# Altium PCB BPC_Clock.PcbDoc
Units mm, origin at the board's own origin, x right, y up, seen from the top; angles counter-clockwise.
Board outline 100.25 x 59.58 mm, 2 copper layers (Top Layer, Bottom Layer); 67 components, 104 nets, 381 pads, 95 vias.
Unrouted connection lines stored in the file: 8.
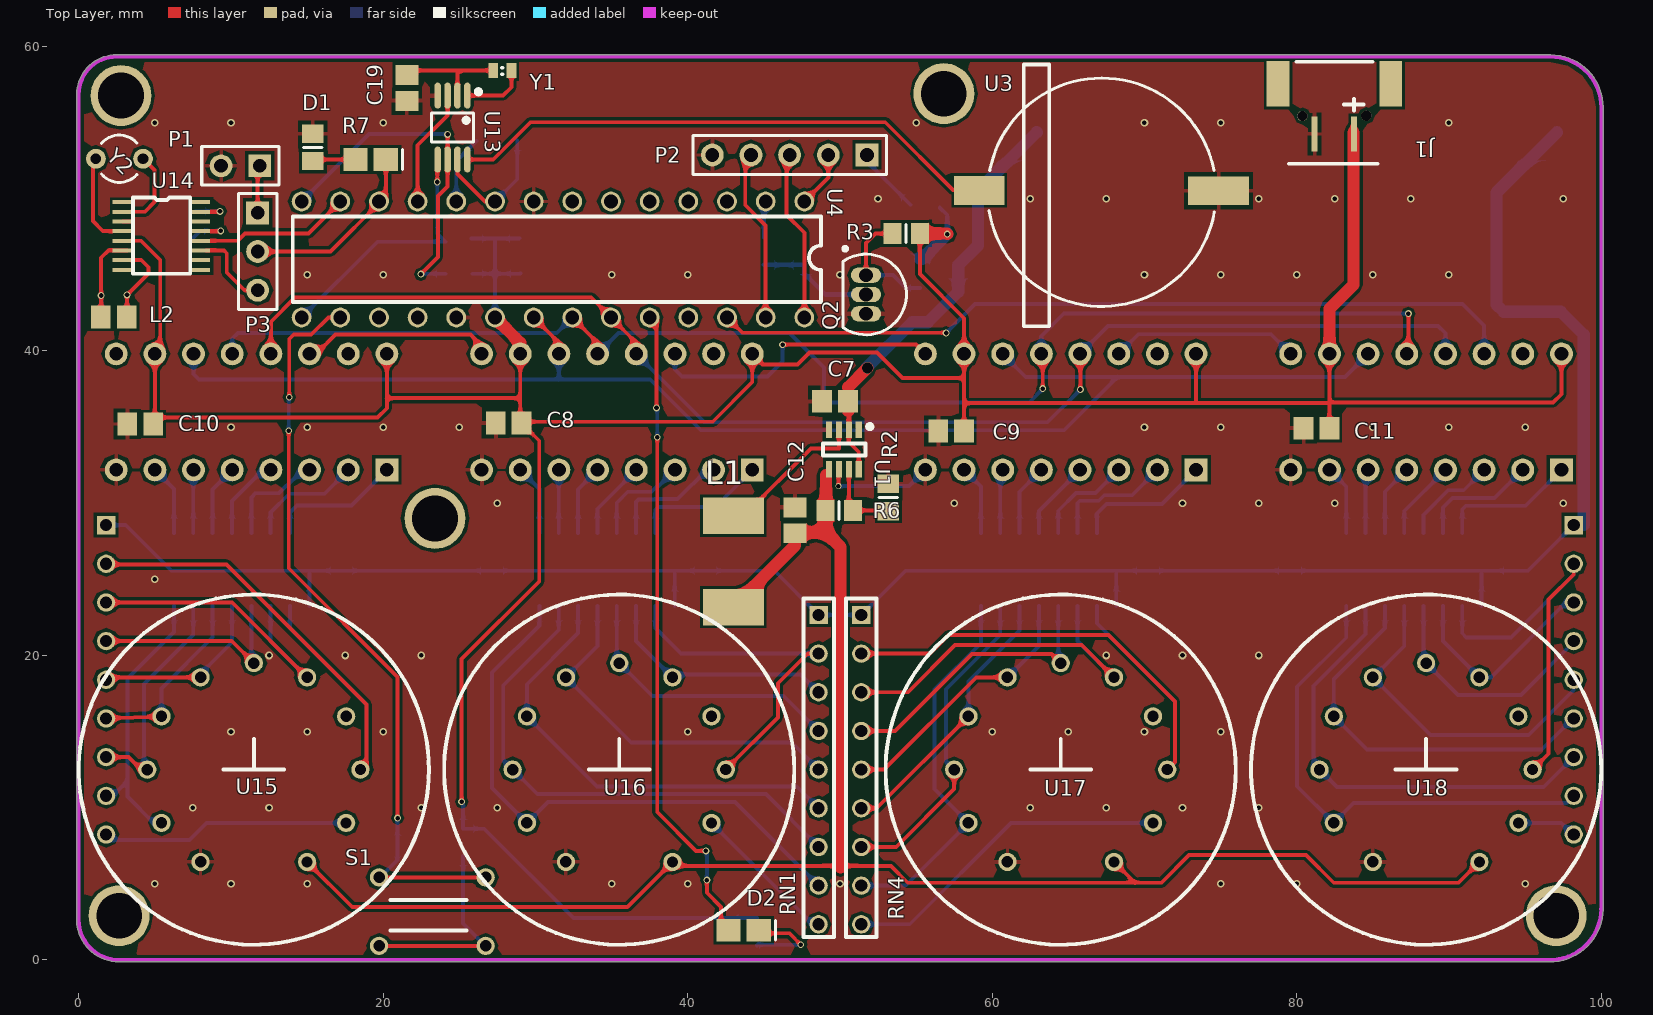
[diagram p0: Top Layer view]
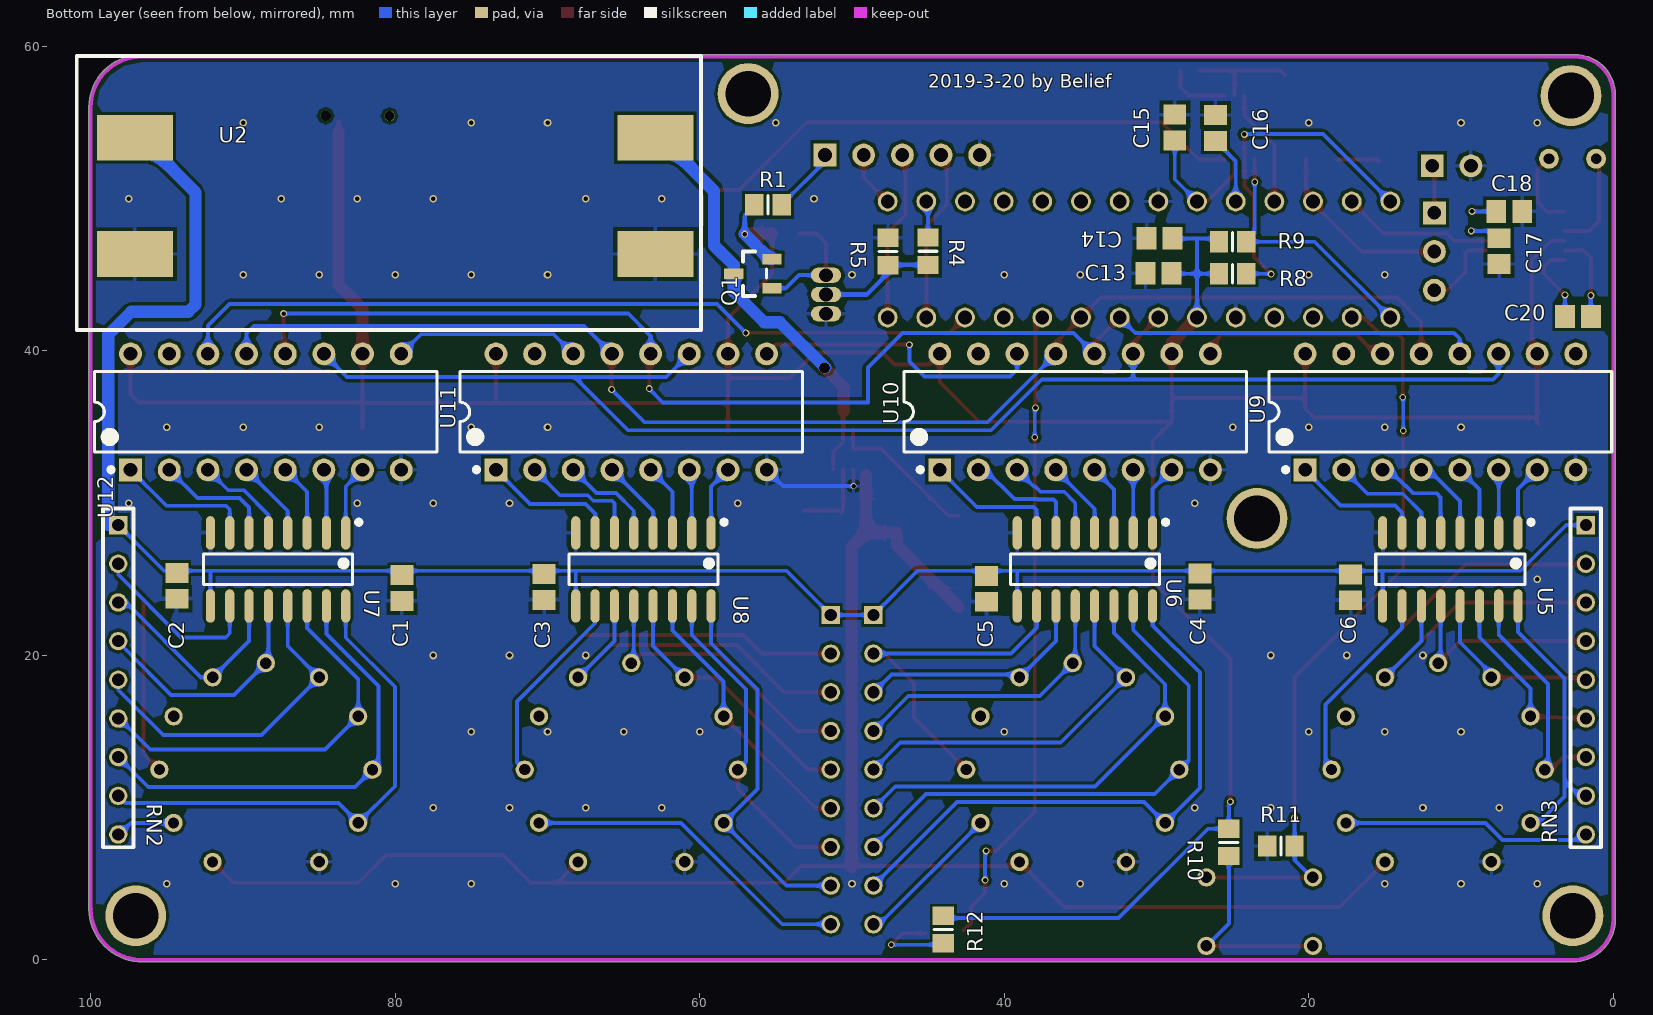
[diagram p1: Bottom Layer view, seen from below]

## Layer stack, top to bottom
Top Solder: solder mask 0.0102, Solder Resist, Dk 3.5
Top Layer: signal copper 0.0356
Dielectric 1: dielectric 0.32, FR-4, Dk 4.8
Bottom Layer: signal copper 0.0356
Bottom Solder: solder mask 0.0102, Solder Resist, Dk 3.5

## Board outline
2.635,-0.127 cw(c2.635,2.635) -0.127,2.635 -0.127,56.855 cw(c2.47,56.855) 2.47,59.452 96.672,59.452 cw(c96.672,59.325) 96.672,59.452 cw(c96.672,55.997) 100.127,55.997 100.127,3.375 cw(c100,3.375) 100.126,3.356 cw(c100,3.339) 100.127,3.339 cw(c100,3.339) 100.127,3.338 cw(c96.625,3.375) 96.625,-0.127

## Design rules (kind name [scope] priority, off if disabled: settings)
Clearance [All] p1: gap=0.2
HoleSize [All] p1: absolutevalues=TRUE maxlimit=3.5 minlimit=0.025 maxpercent=80.000 minpercent=20.000
HoleToHoleClearance [All] p1: gap=0.1 allowstackedmicrovias=TRUE
MinimumSolderMaskSliver [All] p1: minsoldermaskwidth=0.01
PolygonConnect [All] p1: connectstyle=Relief reliefconductorwidth=0.254 reliefentries=4 polygonreliefangle="90 Angle" airgapwidth=0.254
RoomDefinition BPC_Clock [InComponentClass('BPC_Clock')] p1: confinementstyle=ConfineIn formatcopy=TRUE lockcomponents=FALSE outline -6.585,-7.855 167.913,-7.855 167.913,112.414 -6.585,112.414
RoutingVias [All] p1: holewidth=0.3 width=0.5 viastyle="Through Hole" minholewidth=0.3 minwidth=0.4 maxholewidth=3.2 maxwidth=6
SilkToSilkClearance [All] p1: silktosilkclearance=0.01
SilkToSolderMaskClearance [IsPad] p1: minsilkscreentomaskgap=0.01 clearancetoexposedcopper=TRUE
SolderMaskExpansion [All] p1: expansion=0.102
Width [All] p1: maxlimit=0.8 minlimit=0.254 preferedwidth=0.254
25 further rules are at their usual default settings.

## Components (designator, comment, footprint, x,y, rotation, side; value= is the part's Value field where it differs from the comment)
C1 "Cap" CAPC2012N 79.57,24.43 r270 bottom
C2 "Cap" CAPC2012N 94.35,24.575 r270 bottom
C3 "Cap" CAPC2012N 70.225,24.5 r270 bottom
C4 "Cap" CAPC2012N 27.15,24.525 r270 bottom
C5 "Cap" CAPC2012N 41.175,24.375 r270 bottom
C6 "Cap" CAPC2012N 17.25,24.475 r270 bottom
C7 "Cap" CAPC2012N 49.675,36.7 r180 top
C8 "Cap" CAPC2012N 28.24,35.26 r180 top
C9 "Cap" CAPC2012N 57.3,34.75 r180 top
C10 "Cap" CAPC2012N 4.04,35.2 r180 top
C11 "Cap" CAPC2012N 81.3,34.92 r180 top
C12 "Cap" CAPC2012N 47.05,28.875 r90 top
C13 "Cap" CAPC2012N 29.875,45.1 r0 bottom
C14 "Cap" CAPC2012N 29.8,47.4 r0 bottom
C15 "Cap" CAPC2012N 28.8,54.675 r270 bottom
C16 "Cap" CAPC2012N 26.125,54.65 r270 bottom
C17 "Cap" CAPC2012N 7.5,46.56 r270 bottom
C18 "Cap" CAPC2012N 6.83,49.17 r180 bottom
C19 "Cap" CAPC2012N 21.55,57.275 r270 top
C20 "Cap" CAPC2012N 2.32,42.26 r180 bottom
D1 "LED Bpc" CAPC2512N 19.175,52.575 r180 top
D2 "LED State" CAPC2512N 43.675,1.95 r180 top
J1 "microusb" microusb 82.475,54.25 r180 top
L1 "Chip inductors" PCBComponent_1 43,26.175 r90 top
L2 "Antenna" CAPC2012N 2.3,42.235 r180 top
P1 "Test code" HDR1X2 11.89,52.16 r180 top
P2 "Header 5" HDR1X5 51.775,52.875 r180 top
P3 "Jumper" HDR1X3 11.75,49.07 r270 top
Q1 "3415" LC-SOT-23(SOT-23-3) 56.52,45.08 r180 bottom
Q2 "NPN" BCY-W3 51.71,43.71 r180 top
R1 "0" "RES 0805N (2012)" 55.525,49.6 r0 bottom
R2 "80k" "RES 0805N (2012)" 53.175,30.375 r270 top
R3 "100k" "RES 0805N (2012)" 54.35,47.71 r180 top
R4 "10k" "RES 0805N (2012)" 45.01,46.55 r270 bottom
R5 "10k" "RES 0805N (2012)" 47.64,46.53 r270 bottom
R6 "120k" "RES 0805N (2012)" 49.95,29.525 r180 top
R7 "2k" "RES 0805N (2012)" 15.375,53.375 r270 top
R8 "10K" "RES 0805N (2012)" 25,45.075 r0 bottom
R9 "10K" "RES 0805N (2012)" 25,47.175 r0 bottom
R10 "1k" "RES 0805N (2012)" 25.25,7.72 r90 bottom
R11 "2k" "RES 0805N (2012)" 21.83,7.48 r180 bottom
R12 "1k" "RES 0805N (2012)" 44,2 r90 bottom
RN1 "RN-9P" RN-9P 48.6,12.5 r0 top locked
RN2 "RN-9P" RN-9P 98.2,18.4 r180 bottom
RN3 "RN-9P" RN-9P 1.8,18.4 r180 bottom locked
RN4 "RN-9P" RN-9P 51.4,12.5 r0 top locked
S1 "Syn_button" sw 26.475,0.925 r180 top
U1 "MP2161" LC-TSOT-23-8 50.26,33.53 r180 top
U2 "MT3608" MT3608 97.92,54.37 r180 bottom locked
U3 "button_bat" button_bat 67.2,50.425 r270 top locked
U4 "PIC16F1786" PIC-28 47.66,49.82 r270 top locked
U5 "ULN2003" LC-SOP-16_150mil 10.7,25.65 r0 bottom locked
U6 "ULN2003" LC-SOP-16_150mil 34.7,25.65 r0 bottom locked
U7 "ULN2003" LC-SOP-16_150mil 87.7,25.65 r0 bottom locked
U8 "ULN2003" LC-SOP-16_150mil 63.7,25.65 r0 bottom locked
U9 "74HC595" LC-DIP-16 11.35,36 r90 bottom locked
U10 "74HC595" LC-DIP-16 35.35,36 r90 bottom locked
U11 "74HC595" LC-DIP-16 64.5,36 r90 bottom locked
U12 "74HC595" LC-DIP-16 88.5,36 r90 bottom locked
U13 "HYM8563S" LC-MSOP-8 24.55,54.675 r180 top locked
U14 "CME6005" CME6005 5.425,49.775 r0 top
U15 "VFD" IV-11 11.5,12.5 r0 top locked
U16 "VFD" IV-11 35.5,12.5 r0 top locked
U17 "VFD" IV-11 64.5,12.5 r0 top locked
U18 "VFD" IV-11 88.5,12.5 r0 top locked
Y1 "XTAL" Crystal 28.425,58.425 r180 top
Y2 "XTAL" BCY-W2/D3.1 2.675,52.625 r270 top

## Footprints (in the part's own frame and the unit in brackets; to place one, negate y for a bottom-side part, rotate by r counter-clockwise, add the part's x,y. Pads: shape width x height; smd on the part's side, far side on the other; paste and mask are expansions set on the pad)
BCY-W2/D3.1 [mm] "Crystal, Thru-Hole; 2 Leads; Body 3.1 x 8.2 mm (Dia.xH)"
  round 1.3 hole 0.7: 1(0,1.55) 2(0,-1.55)
  silkscreen extent -1.55,-1.19 1.55,1.17
BCY-W3 [mm] "TO, Flat Index; 3 In-Line, Axial Leads; Body Dia. 4.8mm; Leads 0.55 x 0.51 mm (max)"
  oval 2x1 hole 0.9: 1(0,-1.27) 2(0,0) 3(0,1.27)
  silkscreen extent -2.65,-3.13 1.52,2.65, body extent -2.65,-2.66 1.52,2.66, height 5.33
button_bat [mm]
  rect 1.9x3.3 smd: 1(-0.125,-8.05)
  rect 1.9x4 smd: 2(-0.1,7.675)
  silkscreen extent -8.4,-7.4 8.8,7.38
CAPC2012N [mm] "Chip Capacitor, Body 2.0x1.3mm, IPC Medium Density"
  rect 1.3x1.5 smd: 1(-0.85,0) 2(0.85,0)
  body extent -1.1,-0.72 1.1,0.72, height 1.1
CAPC2512N [mm] "Chip Capacitor, Body 2.54x1.27mm, IPC Medium Density"
  rect 1.6x1.5 smd: 1(-1,0) 2(1,0)
  silkscreen extent -2.1,-0.65 -2.1,0.65, body extent -1.45,-0.82 1.45,0.82, height 1.66
CME6005 [mm]
  rect 1.2x0.27 smd: 1(-2.6,0) 2(-2.6,-0.635) 3(-2.6,-1.27) 4(-2.6,-1.905) 5(-2.6,-2.54) 6(-2.6,-3.175) 7(-2.6,-3.81) 8(-2.6,-4.445) 9(2.6,-4.445) 10(2.6,-3.81) 11(2.6,-3.175) 12(2.6,-2.54) 13(2.6,-1.905) 14(2.6,-1.27) 15(2.6,-0.635) 16(2.6,0)
  silkscreen extent -1.85,-4.7 1.9,0.3
Crystal [mm]
  rect 0.65x1 smd: 1(0,0) 2(1.2,0)
  silkscreen extent 0.58,-0.18 0.63,0.25
HDR1X2 [mm] "Connector; Header; 2 Position"
  rect 1.5x1.5 hole 0.9: 1(0,0)
  round 1.5 hole 0.9: 2(2.54,0)
  silkscreen extent -1.27,-1.27 3.81,1.27
HDR1X3 [mm] "Connector; Header; 3 Position"
  rect 1.5x1.5 hole 0.9: 1(0,0)
  round 1.5 hole 0.9: 2(2.54,0) 3(5.08,0)
  silkscreen extent -1.27,-1.27 6.35,1.27
HDR1X5 [mm] "Connector; Header; 5 Position"
  rect 1.5x1.5 hole 0.9: 1(0,0)
  round 1.5 hole 0.9: 2(2.54,0) 3(5.08,0) 4(7.62,0) 5(10.16,0)
  silkscreen extent -1.27,-1.27 11.43,1.27
IV-11 [mm]
  round 1.2 hole 0.73: 1(3.5,-6.062) 2(6.062,-3.5) 3(7,0)
  round 1.2 hole 0.75: 4(6.062,3.5) 5(3.5,6.062) 6(0,7) 7(-3.5,6.062) 8(-6.062,3.5) 9(-7,0) 10(-6.062,-3.5) 11(-3.5,-6.062)
  silkscreen extent -11.5,-11.5 11.5,11.5, body extent -10,-10 10,10, height 50
LC-DIP-16 [mm]
  rect 1.5x1.5 hole 0.9: 1(-3.81,8.89)
  round 1.5 hole 0.9: 2(-3.81,6.35) 3(-3.81,3.81) 4(-3.81,1.27) 5(-3.81,-1.27) 6(-3.81,-3.81) 7(-3.81,-6.35) 8(-3.81,-8.89) 9(3.81,-8.89) 10(3.81,-6.35) 11(3.81,-3.81) 12(3.81,-1.27) 13(3.81,1.27) 14(3.81,3.81) 15(3.81,6.35) 16(3.81,8.89)
  silkscreen extent -3.95,-11.25 2.65,11.25
LC-MSOP-8 [mm]
  oval 0.43x1.7 smd mask+0.051: 1(-0.975,-2.1) 2(-0.325,-2.1) 3(0.325,-2.1) 4(0.975,-2.1) 5(0.975,2.1) 6(0.325,2.1) 7(-0.325,2.1) 8(-0.975,2.1)
  silkscreen extent -1.85,-2.5 1.38,0.95
LC-SOP-16_150mil [mm]
  oval 0.6x2.2 smd: 1(-4.445,-2.4) 2(-3.175,-2.4) 3(-1.905,-2.4) 4(-0.635,-2.4) 5(0.635,-2.4) 6(1.905,-2.4) 7(3.175,-2.4) 8(4.445,-2.4) 9(4.445,2.4) 10(3.175,2.4) 11(1.905,2.4) 12(0.635,2.4) 13(-0.635,2.4) 14(-1.905,2.4) 15(-3.175,2.4) 16(-4.445,2.4)
  silkscreen extent -5.45,-3.25 4.9,1
LC-SOT-23(SOT-23-3) [mm]
  rect 1.25x0.7 smd: 1(1.25,-0.95) 2(-1.25,0) 3(1.25,0.95)
  silkscreen extent -0.65,-1.46 0.9,1.46, body extent -1.5,-1.5 1.5,1.5, height 1.3
LC-TSOT-23-8 [mm]
  rect 0.4x1.1 smd mask+0.051: 1(-0.975,-1.3) 2(-0.325,-1.3) 3(0.325,-1.3) 4(0.975,-1.3) 5(0.975,1.3) 6(0.325,1.3) 7(-0.325,1.3) 8(-0.975,1.3)
  silkscreen extent -1.85,-1.65 1.38,0.4
microusb [mm]
  rect 0.4x2.3 smd: 1(-1.3,0) 2(1.3,0)
  rect 1.5x3 smd: G(-3.7,-3.3) G(3.7,-3.3)
  round 0.67 hole 0.67: N(-2.1,-1.2) N(2.1,-1.175)
  silkscreen extent -2.83,-4.75 3,1.95
MT3608 [mm]
  rect 5x3 smd: 1(0.82,-0.37) 2(0.82,-8) 3(35,-0.37) 4(35,-8)
  silkscreen extent -3,-13 38,5
PCBComponent_1 [mm]
  rect 2.4x4 smd: 1(-3,0) 2(3,0)
PIC-28 [mm]
  round 1.3 hole 0.9: 1(0,0) 2(0,-2.54) 3(0,-5.08) 4(0,-7.62) 5(0,-10.16) 6(0,-12.7) 7(0,-15.24) 8(0,-17.78) 9(0,-20.32) 10(0,-22.86) 11(0,-25.4) 12(0,-27.94) 13(0,-30.48) 14(0,-33.02) 15(7.62,-33.02) 16(7.62,-30.48) 17(7.62,-27.94) 18(7.62,-25.4) 19(7.62,-22.86) 20(7.62,-20.32) 21(7.62,-17.78) 22(7.62,-15.24) 23(7.62,-12.7) 24(7.62,-10.16) 25(7.62,-7.62) 26(7.62,-5.08) 27(7.62,-2.54) 28(7.62,0)
  silkscreen extent 1,-33.6 6.6,1.1
"RES 0805N (2012)" [mm] "Chip Resistor, Body 2.0x1.2mm, IPC Medium Density"
  rect 1.2x1.4 smd: 1(-0.9,0) 2(0.9,0)
  silkscreen extent 0,-0.6 0,0.6, body extent -1,-0.63 1,0.63, height 0.55
RN-9P [mm]
  rect 1.2x1.2 hole 0.8: 1(0,10.16)
  round 1.2 hole 0.8: 2(0,7.62) 3(0,5.08) 4(0,2.54) 5(0,0) 6(0,-2.54) 7(0,-5.08) 8(0,-7.62) 9(0,-10.16)
  silkscreen extent -1,-11 1,11.25
sw [mm]
  round 1.2 hole 0.75: 1(-0.25,0) 1(6.75,0) 2(-0.25,-4.5) 2(6.75,-4.5)
  Top Overlay keep-out lines w0.254: 6,-1 1,-1 ; 6,-3 1,-3
  silkscreen extent 1,-3 6,-1

## Part data
C1 C2 C3 C4 C5 C6 C7 C8 C9 C10 C11 C12 C13 C14 C15 C16 C17 C18 C19 C20: "Capacitor"
D1 D2: library part LED2, "Typical RED, GREEN, YELLOW, AMBER GaAs LED"
L2: library part Inductor, "Inductor"
P1: library part "Header 2", "Header, 2-Pin"
P2: "Header, 5-Pin"
P3: library part "Header 3", "Header, 3-Pin"
Q1: library part PMOS-2, "P-Channel Power MOSFET"
Q2: "NPN Bipolar Transistor"
R1 R2 R3 R4 R5 R6 R7 R8 R9 R10 R11 R12: library part Res1, "Resistor"
S1: library part SW-PB, "Switch"
Y1 Y2: "Crystal Oscillator"

## Free pads (board coordinates)
  round 4 hole 3: 0(2.65,2.9) 0(2.775,56.775) 1(97.05,2.9) 3(23.4,29) 5(56.825,56.9)

## Via types
v1: diameter 0.5, hole 0.3, Top Layer to Bottom Layer, 71 vias
v2: diameter 0.45, hole 0.3, Top Layer to Bottom Layer, 22 vias
v3: diameter 0.4, hole 0.3, Top Layer to Bottom Layer, 1 vias
v4: diameter 0.711, hole 0.711, Top Layer to Bottom Layer, 1 vias

## Nets (pads, with @x,y where several pads share a name; then routed paths per layer and width w, separated by ;. In a path a pad name is that pad's centre, name@x,y a point inside that pad or via, vN(x,y) a via of type N, cw(c..) or ccw(c..) an arc to the next point about the centre after c; other vN are vias at no path point)
BPC_CODE: P3.3 U14.11 | length 5.2
  Top Layer w0.254: U14.11@8.385,46.605 9.535,46.605 9.722,46.418 9.722,45.158 10.89,43.99 P3.3
BPC_DATA: D1.1 P3.2 U4.12 | length 12.3
  Top Layer w0.254: P3.2 16.53,46.53 U4.12@19.77,49.77 ; U4.12 20.175,50.275 D1.1
BPC_ON: U4.13 U14.12 | length 9.9
  Top Layer w0.254: U14.12@8.385,47.24 10.45,47.24 10.93,47.72 15.08,47.72 U4.13
BPC_TEST: P1.1 P3.1 | length 3.1
  Top Layer w0.254: P3.1 11.75,52.02 P1.1
CLKOUT: C15.2 U4.9 U13.7 | length 8.8
  Top Layer w0.254: U13.7 24.875,51.625 26.68,49.82 U4.9
  Bottom Layer w0.254: U4.9 28.8,51.28 C15.2
GND: C1.2 C2.2 C3.2 C4.2 C5.2 C6.2 C7.2 C8.2 C9.2 C10.2 C11.2 C12.2 C13.2 C14.2 C15.1 C16.1 C17.2 C18.2 C19.2 J1.2 P1.2 P2.5 Q2.3 R2.1 R5.1 R7.1 R11.1 U1.4 U1.6 U2.2 U2.4 U3.2 U4.8 U4.19 U5.8 U6.8 U7.8 U8.8 U9.8 U10.8 U11.8 U12.8 U13.4 U14.3 U15.11 U16.11 U17.11 U18.11 | length 7.3
  Top Layer w0.254: v3(49.9,31.125) 49.9,32.195 U1.6
  Bottom Layer w0.254: v3(49.9,31.125) 54.545,31.125 U11.8
  other v1: 5,5 10,5 15,5 35,5 40,5 50,5 75,5 80,5 95,5 7.5,10 12.5,10 22.5,10 27.5,10 62.5,10 67.5,10 72.5,10 77.5,10 10,15 15,15 20,15 40,15 60,15 65,15 70,15 75,15 12.5,20 17.5,20 22.5,20 67.5,20 72.5,20 77.5,20 5,25 27.5,30 57.5,30 72.5,30 77.5,30 82.5,30 97.5,30 10,35 15,35 20,35 25,35 70,35 75,35 85,35 90,35 95,35 15,45 20,45 35,45 40,45 50,45 70,45 75,45 80,45 85,45 90,45 52.5,50 62.5,50 67.5,50 77.5,50 82.5,50 87.5,50 97.5,50 5,55 10,55 20,55 55,55 70,55 75,55 90,55
LIGHT_ON: R4.1 U4.2 | length 2.4
  Bottom Layer w0.254: R4.1 45.01,49.71 U4.2
NetC16_2: C16.2 U4.10 | length 4.5
  Bottom Layer w0.254: U4.10 24.8,52.475 C16.2
NetC17_1: C17.1 U14.13 | length 3
  Top Layer w0.254: U14.13@8.385,47.875 9.315,47.875 v2(9.33,47.89)
  Bottom Layer w0.254: C17.1 7.98,47.89 v2(9.33,47.89)
NetC18_1: C18.1 U14.15 | length 2.5
  Top Layer w0.254: U14.15@8.385,49.145 9.255,49.145 v2(9.28,49.17)
  Bottom Layer w0.254: C18.1 v2(9.28,49.17)
NetC19_1: C19.1 U13.2 Y1.2 | length 7.5
  Top Layer w0.254: C19.1 21.85,58.425 25.075,58.425 ; U13.2 24.875,58.225 25.075,58.425 ; Y1.2 25.075,58.425
NetC20_1: C20.1 L2.1 U14.7 | length 6.8
  Top Layer w0.254: L2.1@3.17,42.26 v2(3.17,43.685) 4.575,45.09 4.575,45.5 4.105,45.97 U14.7@3.185,45.97
  Bottom Layer w0.254: C20.1@3.17,42.245 C20.1 v2(3.17,43.685)
NetC20_2: C20.2 L2.2 U14.6 | length 7.2
  Top Layer w0.254: L2.2@1.47,42.26 v2(1.47,43.645) 1.47,46.12 1.955,46.605 U14.6@3.185,46.605
  Bottom Layer w0.254: C20.2@1.47,42.245 C20.2 v2(1.47,43.645)
NetD1_2: D1.2 R7.2 | length 2.8
  Top Layer w0.254: R7.2 15.475,52.575 D1.2
NetD2_1: D2.1 R12.1 | length 5.5
  Top Layer w0.254: D2.1@45.175,1.75 46.675,1.75 v2(47.425,1)
  Bottom Layer w0.254: R12.1@44.55,0.95 44.64,1.04 44.68,1 v2(47.425,1)
NetL1_2: L1.2 U1.3 | length 10
  Top Layer w0.254: L1.2 43.675,29.175 48.095,33.595 49.935,33.595 U1.3
NetP2_1: P2.1 R1.1 | length 4.5
  Bottom Layer w0.254: P2.1 51.775,52.45 R1.1
NetQ1_1: Q1.1 Q2.1 R3.2 | length 8
  Top Layer w0.254: Q2.1 51.71,47.09 52.33,47.71 R3.2
  Bottom Layer w0.254: Q2.1 53.49,44.98 54.34,44.13 Q1.1
NetQ2_2: Q2.2 R4.2 R5.2 | length 7.8
  Bottom Layer w0.3: R4.2 47.62,45.65 R5.2 47.64,45.11 49.04,43.71 Q2.2
NetR2_2: R2.2 R6.1 U1.7 | length 5.2
  Top Layer w0.254: U1.7 50.585,29.515 R6.1@50.712,29.388 ; R6.1 53.125,29.525 R2.2
NetR10_1: R10.1 S1.2 | length 13.5
  Top Layer w0.254: 19.725,0.925 26.725,0.925
  Bottom Layer w0.254: R10.1 25.25,2.4 26.725,0.925
NetU5_1: U5.1 U9.7 | length 4.7
  Bottom Layer w0.254: U9.7 6.255,30.935 U5.1
NetU5_2: U5.2 U9.6 | length 4.1
  Bottom Layer w0.254: U5.2 7.525,32.175 U9.6
NetU5_3: U5.3 U9.5 | length 4.7
  Bottom Layer w0.254: U5.3 8.795,30.905 U9.5
NetU5_4: U5.4 U9.4 | length 5.5
  Bottom Layer w0.254: U5.4 10.065,30.155 12.1,32.19 U9.4
NetU5_5: U5.5 U9.3 | length 7.1
  Bottom Layer w0.254: U5.5 11.335,30.385 11.608,30.658 13.15,30.658 13.62,31.128 13.655,31.128 14.498,31.971 14.719,31.749 U9.3
NetU5_6: U5.6 U9.2 | length 7.6
  Bottom Layer w0.254: U5.6 12.605,29.395 13.83,30.62 16.13,30.62 U9.2
NetU5_7: U5.7 U9.1 | length 8.9
  Bottom Layer w0.254: U5.7 13.875,29.4 14.335,29.86 17.91,29.86 U9.1
NetU6_1: U6.1 U10.7 | length 4.7
  Bottom Layer w0.254: U10.7 30.255,30.935 U6.1
NetU6_2: U6.2 U10.6 | length 4.1
  Bottom Layer w0.254: U6.2 31.525,32.175 U10.6
NetU6_3: U6.3 U10.5 | length 4.7
  Bottom Layer w0.254: U6.3 32.795,30.905 U10.5
NetU6_4: U6.4 U10.4 | length 5.2
  Bottom Layer w0.254: U6.4 34.065,29.635 U10.4
NetU6_5: U6.5 U10.3 | length 6.7
  Bottom Layer w0.254: U6.5 35.335,30.025 36.06,30.75 37.623,30.75 37.969,31.096 38.066,31.096 U10.3
NetU6_6: U6.6 U10.2 | length 8
  Bottom Layer w0.254: U6.6 36.605,30.085 36.762,30.242 37.834,30.242 37.862,30.27 39.34,30.27 41.26,32.19 U10.2
NetU6_7: U6.7 U10.1 | length 9
  Bottom Layer w0.254: U6.7 37.875,29.565 38.072,29.762 41.812,29.762 U10.1
NetU7_1: U7.1 U12.7 | length 4.6
  Bottom Layer w0.254: U12.7 83.255,31.085 U7.1
NetU7_2: U7.2 U12.6 | length 4.2
  Bottom Layer w0.254: U7.2 84.525,32.025 U12.6
NetU7_3: U7.3 U12.5 | length 4.7
  Bottom Layer w0.254: U7.3 85.795,30.755 U12.5
NetU7_4: U7.4 U12.4 | length 5.3
  Bottom Layer w0.254: U7.4 87.065,29.485 U12.4
NetU7_5: U7.5 U12.3 | length 6.4
  Bottom Layer w0.254: U7.5 88.335,29.235 89.95,30.85 90.97,30.85 U12.3
NetU7_6: U7.6 U12.2 | length 7.9
  Bottom Layer w0.254: U7.6 89.605,29.725 90.222,30.342 93.002,30.342 U12.2
NetU7_7: U7.7 U12.1 | length 9.1
  Bottom Layer w0.254: U7.7 90.875,29.595 91.114,29.834 95.034,29.834 U12.1
NetU8_1: U8.1 U11.7 | length 4.6
  Bottom Layer w0.254: U11.7 59.255,31.085 U8.1
NetU8_2: U8.2 U11.6 | length 4.2
  Bottom Layer w0.254: U8.2 60.525,32.025 U11.6
NetU8_3: U8.3 U11.5 | length 4.7
  Bottom Layer w0.254: U8.3 61.795,30.755 U11.5
NetU8_4: U8.4 U11.4 | length 5.3
  Bottom Layer w0.254: U8.4 63.065,29.485 U11.4
NetU8_5: U8.5 U11.3 | length 6.5
  Bottom Layer w0.254: U8.5 64.335,29.505 65.5,30.67 66.79,30.67 U11.3
NetU8_6: U8.6 U11.2 | length 8.1
  Bottom Layer w0.254: U8.6 65.605,29.995 65.772,30.162 67,30.162 67.358,30.52 69.18,30.52 U11.2
NetU8_7: U8.7 U11.1 | length 9
  Bottom Layer w0.254: U8.7 66.875,29.318 67.507,29.95 71.15,29.95 U11.1
NetU9_14: U9.14 U10.9 | length 13.2
  Top Layer w0.254: U9.14 15.16,40.25 15.46,39.95 15.75,39.95 16.87,41.07 25.72,41.07 26.46,40.33 U10.9
NetU10_14: U10.14 U11.9 | length 19.6
  Top Layer w0.254: U10.14 U10.14@39.39,39.81 ; v2@46.25,40.42 55,40.42 U11.9
  Bottom Layer w0.254: U10.14 39.16,38.79 39.62,38.33 45.24,38.33 46.23,39.32 v2(46.23,40.41)
NetU11_14: U11.14 U12.9 | length 12.4
  Bottom Layer w0.254: U11.14 69.6,41.1 78.32,41.1 U12.9
NetU13_1: U13.1 Y1.1 | length 4.2
  Top Layer w0.254: U13.1 27.875,56.775 28.425,57.325 Y1.1
NetU14_2: U14.2 Y2.2 | length 5.2
  Top Layer w0.254: U14.2@3.185,49.145 4.345,49.145 4.975,49.775 4.975,51.875 4.225,52.625
NetU14_4: U14.4 Y2.1 | length 6.6
  Top Layer w0.254: 0.925,52.625 0.925,48.525 1.575,47.875 U14.4@3.185,47.875
PIC_CLK: P2.4 U4.27 | length 11.4
  Top Layer w0.254: P2.4 43.775,52.495 43.775,49.575 45.12,48.23 U4.27
PIC_DA: P2.3 U4.28 | length 11.2
  Top Layer w0.254: P2.3 46.5,52.68 46.5,48.925 47.66,47.765 U4.28
PIC_DATA: U4.26 U12.14 | length 53.4
  Top Layer w0.254: U4.26 43.58,41.2 v2@57,41.2
  Bottom Layer w0.254: v2(56.97,41.18) 58.871,43.081 90.889,43.081 92.31,41.66 U12.14
PIC_INT: U4.11 U13.3 | length 7.8
  Top Layer w0.254: U4.11 22.26,53.51 24.225,55.475 U13.3
PIC_OE: U4.23 U9.13 U10.13 U11.13 U12.13 | length 89.3
  Top Layer w0.254: U9.13 12.62,41.92 14.2,43.5 33.66,43.5 U4.23 36.62,40.54 U10.13 ; U11.13 65.79,39.79 v2(65.79,37.47)
  Bottom Layer w0.254: U10.13 41.11,35.32 63.64,35.32 v2(65.79,37.47) ; U11.13 67.6,41.64 89.29,41.64 89.77,41.16 U12.13
PIC_SCL: R8.1 U4.14 U13.6 | length 23
  Top Layer w0.254: v2(22.475,45.05) 23.6,46.175 23.6,50.175 24.225,50.8 U13.6 v2(24.225,54.225)
  Bottom Layer w0.254: U4.14 19.07,54.25 24.075,54.25 v2@24.225,54.1 ; v2(22.475,45.05) 22.5,45.075 R8.1
PIC_SDA: R9.1 U4.15 U13.5 | length 17.1
  Top Layer w0.254: v2(23.55,51.1) 23.55,52.55 U13.5
  Bottom Layer w0.254: U4.15 19.615,47.175 R9.1@24.05,47.175 ; v2(23.55,51.1) 23.55,47.725 R9.1
PIC_SHCP: U4.21 U9.11 U10.11 U11.11 U12.11 | length 95
  Top Layer w0.254: U4.21 31.54,40.54 U10.11
  Bottom Layer w0.254: U9.11 7.54,38.49 7.91,38.12 31.54,38.12 ; U10.11 31.54,38.12 ; U11.11 62.2,38.3 68.22,38.3 ; U12.11 83.18,38.3 68.22,38.3 ; 31.54,38.12 37.54,38.12 40.87,34.79 64.71,34.79 68.22,38.3
PIC_STCP: U4.22 U9.12 U10.12 U11.12 U12.12 | length 91.4
  Top Layer w0.254: U4.22 34.08,40.54 U10.12 ; U11.12 63.32,39.72 v2(63.32,37.53) ; U12.12 87.34,39.92 v2(87.34,42.45)
  Bottom Layer w0.254: U9.12 10.08,40.81 10.45,41.18 31.4,41.18 U4.22 ; U10.12 35.46,41.19 46.69,41.19 48.96,38.92 48.96,36.61 62.43,36.61 v2@63.38,37.56 ; U11.12 63.23,40.984 64.696,42.45 v2(87.34,42.45)
PIC_VPP: P2.2 U4.1 | length 3.7
  Top Layer w0.254: U4.1 49.235,51.395 P2.2
STATE: D2.2 U4.24 | length 42.8
  Top Layer w0.254: U4.24 37.95,41.75 v2(37.95,36.26) ; v2(38,34.33) 38,9.71 40.55,7.16 v2(41.19,7.16) ; v2(41.26,5.24) 41.26,4.41 42.19,3.48 42.19,2.435 D2.2
  Bottom Layer w0.254: v2(37.95,36.26) 38,36.21 v2(38,34.33) ; v2(41.19,7.16) 41.26,7.09 v2(41.26,5.24)
SYN: R11.2 S1.1 U4.16 | length 49.9
  Top Layer w0.254: v2(13.79,34.76) 13.79,25.73 20.94,18.58 v2@20.94,9.33 ; v2(13.83,36.96) 13.83,40.78 14.125,41.075 15.275,41.075 16.4,42.2 U4.16 ; 19.725,5.425 26.725,5.425
  Bottom Layer w0.254: v2(13.79,34.76) 13.79,36.92 v2(13.83,36.96) ; 19.7,5.325 20.93,6.555 R11.2 20.93,9.31 v2(20.94,9.32)
VBAT: U3.1 U13.8 | length 36.5
  Top Layer w0.254: U13.8 27.225,52.575 29.675,55.025 52.975,55.025 57.425,50.575 U3.1@59.2,50.575
VCC: C8.1 C9.1 C10.1 C11.1 C13.1 C14.1 J1.1 Q1.3 R1.2 R3.1 R8.2 R9.2 R10.2 R12.2 U4.20 U9.10 U9.16 U10.10 U10.16 U11.10 U11.16 U12.10 U12.16 U14.5 | length 231.9
  Top Layer w0.254: U14.5@3.185,47.24 4.085,47.24 5.35,45.975 5.35,40.16 U9.10 C10.1@5,35.63 ; C10.1 5,35.31 C10.1@5,35.63 ; U9.16 20.24,36.9 ; v2(25.15,10.39) 25.15,19.76 30.25,24.86 30.25,34.1 C8.1 29,35.35 41.64,35.35 44.24,37.95 U10.16 44.95,39.1 47.2,39.1 47.991,39.891 52.429,39.891 54.1,38.22 58.15,38.22 ; C8.1@29,35.27 29,36.9 ; U10.10 29,36.9 ; R3.1 55.25,45.05 58.15,42.15 U11.10 58.15,38.22 ; C9.1 58.15,36.57 ; 73.39,36.63 U11.16 ; C11.1 82.15,36.57 ; U12.10 82.15,36.61 ; J1.1@83.725,54.35 J1.1@83.725,55.1 ; U12.16 97.39,37.16 96.84,36.61 82.15,36.61 ; C10.1@5,35.63 19.63,35.63 20.24,36.24 20.24,36.9 ; 20.24,36.9 29,36.9 ; 58.15,36.57 82.15,36.57 ; 58.15,36.57 58.15,38.22 ; 82.15,36.57 82.15,36.61
  Top Layer w0.8: U4.20 29,40.54 U10.10 ; R3.1@55.325,47.785 R3.1 57.02,47.71 v2(57.05,47.68) ; U12.10 82.15,42.775 83.725,44.35 J1.1@83.725,54.35
  Bottom Layer w0.254: v2(25.15,10.39) 25.25,10.29 R10.2 26.63,8.62 32.5,2.75 R12.2@44.55,2.75 ; R9.2@25.8,47.375 27.325,47.375 ; R8.2@25.85,45.075 R8.2 27.34,45.075 ; U4.20@27.34,42.39 27.34,45.075 ; C14.1 28.925,47.375 27.325,47.375 ; C13.1 29,45.075 27.34,45.075 ; R1.2@56.55,49.425 57.05,48.925 v2(57.05,47.68) ; 27.325,47.375 27.34,47.36 27.34,45.075
  Bottom Layer w0.8: U4.20@27.34,42.39 27.53,42.2 U4.20@27.529,42.211 ; Q1.3 55.4,46.03 v2(57.05,47.68)
VCC_LIGHT: C7.1 Q1.2 U1.2 U1.8 U2.3 | length 28.1
  Top Layer w0.254: C7.1@50.54,37.22 50.54,37.615 ; U1.2 50.585,34.005 51.235,33.355 U1.8
  Top Layer w0.3: C7.1@50.54,36.05 50.585,36.005 U1.2
  Top Layer w0.8: C7.1@50.54,36.05 C7.1@50.54,37.22 ; 50.54,37.615 v4(51.8,38.875)
  Bottom Layer w0.8: v4@51.762,38.913 54.74,41.89 55.77,41.89 57.77,43.89 Q1.2 57.77,45.64 59.06,46.93 59.06,50.51 U2.3@62.92,54.37
VH: C1.1 C2.1 C3.1 C4.1 C5.1 C6.1 RN1.1 RN2.1 RN3.1 RN4.1 U2.1 U5.9 U6.9 U7.9 U8.9 | length 143.3
  Bottom Layer w0.254: RN3.1 3.09,28.56 6.09,25.56 15.24,25.56 ; U5.9 15.145,25.465 15.24,25.56 ; U6.9 39.145,25.545 39.13,25.56 ; U8.9 68.145,25.515 68.1,25.56 ; U7.9 92.145,25.545 92.13,25.56 ; RN2.1 95.2,25.56 92.13,25.56 ; 15.24,25.56 39.13,25.56 ; 39.13,25.56 45.7,25.56 RN1.1 RN4.1 54.3,25.56 68.1,25.56 ; 68.1,25.56 92.13,25.56
  Bottom Layer w0.8: U2.1@97.1,54.37 93.13,50.4 93.13,43.04 93.6,42.57 97.34,42.57 98.85,41.06 98.85,28.56 RN2.1
VL: C12.1 L1.1 R6.2 U1.5 U15.1 U16.1 U17.1 U18.1 | length 118.7
  Top Layer w0.254: U15.1 17.968,3.47 36.032,3.47 U16.1@38.632,6.07 ; U16.1 38.741,6.179 50.03,6.179 53.341,6.179 54.45,5.07 69.368,5.07 ; 50.03,27.13 50.04,27.14 ; U17.1 69.368,5.07 ; 69.379,5.059 69.368,5.07 ; U18.1 90.632,5.07 82.43,5.07 80.61,6.89 72.93,6.89 71.11,5.07 69.368,5.07
  Top Layer w0.8: L1.1 47.05,27.225 C12.1 47.105,28.08 49.08,28.08 ; 49.08,31.84 49.08,28.08 ; 50.03,24.98 50.03,6.179 50.03,6.09 50.04,6.08 ; 50.03,25.075 50.03,27.13 49.08,28.08
Y1: RN3.9 U15.2 | length 16.4
  Bottom Layer w0.254: RN3.9 2.165,7.875 7.275,7.875 8.4,9 U15.2
Y1A: RN3.2 U5.10 U15.3 | length 38.3
  Top Layer w0.254: RN3.2@1.8,25.975 9.695,25.975 18.9,16.77 18.9,12.9 U15.3
  Bottom Layer w0.254: U5.10 13.875,21.8 18.9,16.775 18.9,12.9 U15.3
Y1B: RN3.3 U5.11 U15.5 | length 20.9
  Top Layer w0.254: RN3.3 10.082,23.48 U15.5
  Bottom Layer w0.254: U5.11 12.605,20.957 U15.5
Y1C: RN3.4 U5.12 U15.6 | length 14.7
  Top Layer w0.254: RN3.4 1.8,20.525 2.225,20.95 10.05,20.95 U15.6
  Bottom Layer w0.254: U5.12 11.335,19.665 U15.6
Y1D: RN3.5 U5.13 U15.7 | length 11.7
  Top Layer w0.254: RN3.5@1.8,18.562 U15.7
  Bottom Layer w0.254: U15.7 8,18.8 10.065,20.865 U5.13
Y1E: RN3.6 U5.14 U15.8 | length 12.3
  Top Layer w0.254: RN3.6 U15.8
  Bottom Layer w0.254: U15.8 5.438,17.838 8.795,21.195 U5.14
Y1F: RN3.7 U5.15 U15.9 | length 15.2
  Top Layer w0.254: RN3.7 3.275,13.32 4.095,12.5 U15.9
  Bottom Layer w0.254: U15.9 4.275,12.725 4.275,18.125 7.525,21.375 U5.15
Y1G: RN3.8 U5.16 U15.10 | length 18.5
  Bottom Layer w0.254: RN3.8 2.23,10.78 3.2,11.75 ; U15.10 4.925,9 3.2,10.725 3.2,11.75 ; U5.16 6.255,21.53 3.2,18.475 3.2,11.75
Y2: RN1.9 U16.2 | length 9.8
  Bottom Layer w0.254: U16.2 48.222,2.34 RN1.9
Y2A: RN1.2 U6.10 U16.3 | length 23.4
  Top Layer w0.254: U16.3 45.93,15.93 45.93,18.17 47.88,20.12 RN1.2
  Bottom Layer w0.254: U6.10 37.875,21.805 39.56,20.12 RN1.2
Y2B: RN1.3 U6.11 U16.5 | length 15.9
  Bottom Layer w0.254: U6.11 36.605,20.957 U16.5 39.198,18.76 47.42,18.76 RN1.3
Y2C: RN1.4 U6.12 U16.6 | length 18.8
  Bottom Layer w0.254: U6.12 35.335,19.665 U16.6 37.67,17.33 46.31,17.33 RN1.4
Y2D: RN1.5 U6.13 U16.7 | length 24.7
  Bottom Layer w0.254: U6.13 34.065,20.627 U16.7 36.292,14.27 46.83,14.27 RN1.5
Y2E: RN1.6 U6.14 U16.8 | length 30.3
  Bottom Layer w0.254: U6.14 32.795,21.465 29.438,18.108 U16.8 34.042,11.396 47.164,11.396 RN1.6
Y2F: RN1.7 U6.15 U16.9 | length 34.7
  Bottom Layer w0.254: U6.15 31.525,21.675 27.88,18.03 27.88,13.12 U16.9 28.506,12.5 30.118,10.888 45.132,10.888 RN1.7
Y2G: RN1.8 U6.16 U16.10 | length 38.5
  Bottom Layer w0.254: U6.16 30.255,21.975 27.15,18.87 27.15,11.288 U16.10 30.818,10.38 43.1,10.38 RN1.8
Y3: RN4.9 U17.2 | length 21.9
  Bottom Layer w0.254: RN4.9 54.58,2.34 61.24,9 U17.2
Y3A: RN4.2 U8.10 U17.3 | length 40.7
  Top Layer w0.254: RN4.2 55.91,20.12 57.13,21.34 67.63,21.34 72,16.97 72,13 U17.3
  Bottom Layer w0.254: U8.10 66.875,22.115 72.01,16.98 72.01,13.01 U17.3
Y3B: RN4.3 U8.11 U17.5 | length 24.4
  Top Layer w0.254: RN4.3 54.46,17.58 57.56,20.68 65.882,20.68 U17.5
  Bottom Layer w0.254: U8.11 65.605,20.957 U17.5
Y3C: RN4.4 U8.12 U17.6 | length 19.3
  Top Layer w0.254: RN4.4 53.61,15.04 58.67,20.1 63.9,20.1 U17.6
  Bottom Layer w0.254: U8.12 64.335,19.665 U17.6
Y3D: RN4.5 U8.13 U17.7 | length 17.7
  Top Layer w0.254: RN4.5 52.89,12.5 58.952,18.562 U17.7
  Bottom Layer w0.254: U17.7 63.065,20.627 U8.13
Y3E: RN4.6 U8.14 U17.8 | length 18.2
  Top Layer w0.254: RN4.6 52.398,9.96 U17.8
  Bottom Layer w0.254: U17.8 58.438,18.288 61.795,21.645 U8.14
Y3F: RN4.7 U8.15 U17.9 | length 21.4
  Top Layer w0.254: RN4.7 53.7,7.42 57.5,11.22 U17.9
  Bottom Layer w0.254: U17.9 56.96,13.04 56.96,17.78 60.525,21.345 U8.15
Y3G: RN4.8 U8.16 U17.10 | length 25.2
  Bottom Layer w0.254: RN4.8 54.318,4.88 U17.10 56.22,11.218 56.22,17.77 59.255,20.805 U8.16
Y4: RN2.9 U18.2 | length 3.9
  Bottom Layer w0.254: U18.2 97.375,9 RN2.9@98.167,8.207
Y4A: RN2.2 U7.10 U18.3 | length 26.3
  Top Layer w0.254: U18.3 96.54,13.54 96.54,23.665 98.2,25.325 RN2.2
  Bottom Layer w0.254: U7.10 90.875,21.455 91.14,21.19 94.065,21.19 98.2,25.325 RN2.2
Y4B: RN2.3 U7.11 U18.5 | length 13.9
  Bottom Layer w0.254: U7.11 89.605,20.957 U18.5 92.762,18.562 97.665,23.465 RN2.3@98.215,23.465
Y4C: RN2.4 U7.12 U18.6 | length 15.2
  Bottom Layer w0.254: U7.12 88.335,19.665 U18.6 90.59,17.41 94.735,17.41 97.732,20.407
Y4D: RN2.5 U7.13 U18.7 | length 22.2
  Bottom Layer w0.254: U7.13 87.065,20.627 U18.7 88.792,14.77 95.245,14.77 98.2,17.725 RN2.5
Y4E: RN2.6 U7.14 U18.8 | length 26.1
  Bottom Layer w0.254: U7.14 85.795,21.805 82.438,18.448 U18.8 84.613,13.825 96.1,13.825 RN2.6@98.167,15.893
Y4F: RN2.7 U7.15 U18.9 | length 30.3
  Bottom Layer w0.254: U7.15 84.525,21.405 81.11,17.99 81.11,12.89 U18.9 82.65,11.35 96.23,11.35 RN2.7
Y4G: RN2.8 U7.16 U18.10 | length 33.1
  Bottom Layer w0.254: U7.16 83.255,21.165 80.03,17.94 80.03,11.408 U18.10 83.738,10.3 97.72,10.3 RN2.8
pads on no net: J1.G J1.N U1.1 U4.3 U4.4 U4.5 U4.6 U4.7 U4.17 U4.18 U4.25 U9.9 U9.15 U10.15 U11.15 U12.15 U14.1 U14.8 U14.9 U14.10 U14.14 U14.16 U15.4 U16.4 U17.4 U18.4

## Polygon pours and split planes (outlines as drawn)
GND on Top Layer "TGND" (solid, remove dead copper, pour order 2): 0,60 100,60 100,0 0,0
GND on Bottom Layer "BGND" (solid, remove dead copper, pour order 4): 0,60 100,60 100,0 0,0

## Keep-outs
Keep-Out Layer:
  lines w0.254: 96.589,0 ccw(c96.625,3.375) 100,3.339 ; 96.625,0 2.635,0 cw(c2.635,2.635) 0,2.635 0,56.855 cw(c2.47,56.855) 2.47,59.325 60.775,59.325 96.672,59.325 cw(c96.672,55.997) 100,55.997 100,3.375

## Silkscreen, mask and mechanical layers (free items; w line width, h text height)
Bottom Overlay:
  text "2019-3-20 by Belief" at 45,57 h1.5